# EAGLE board Pro mini (EAGLE 9.6.0)
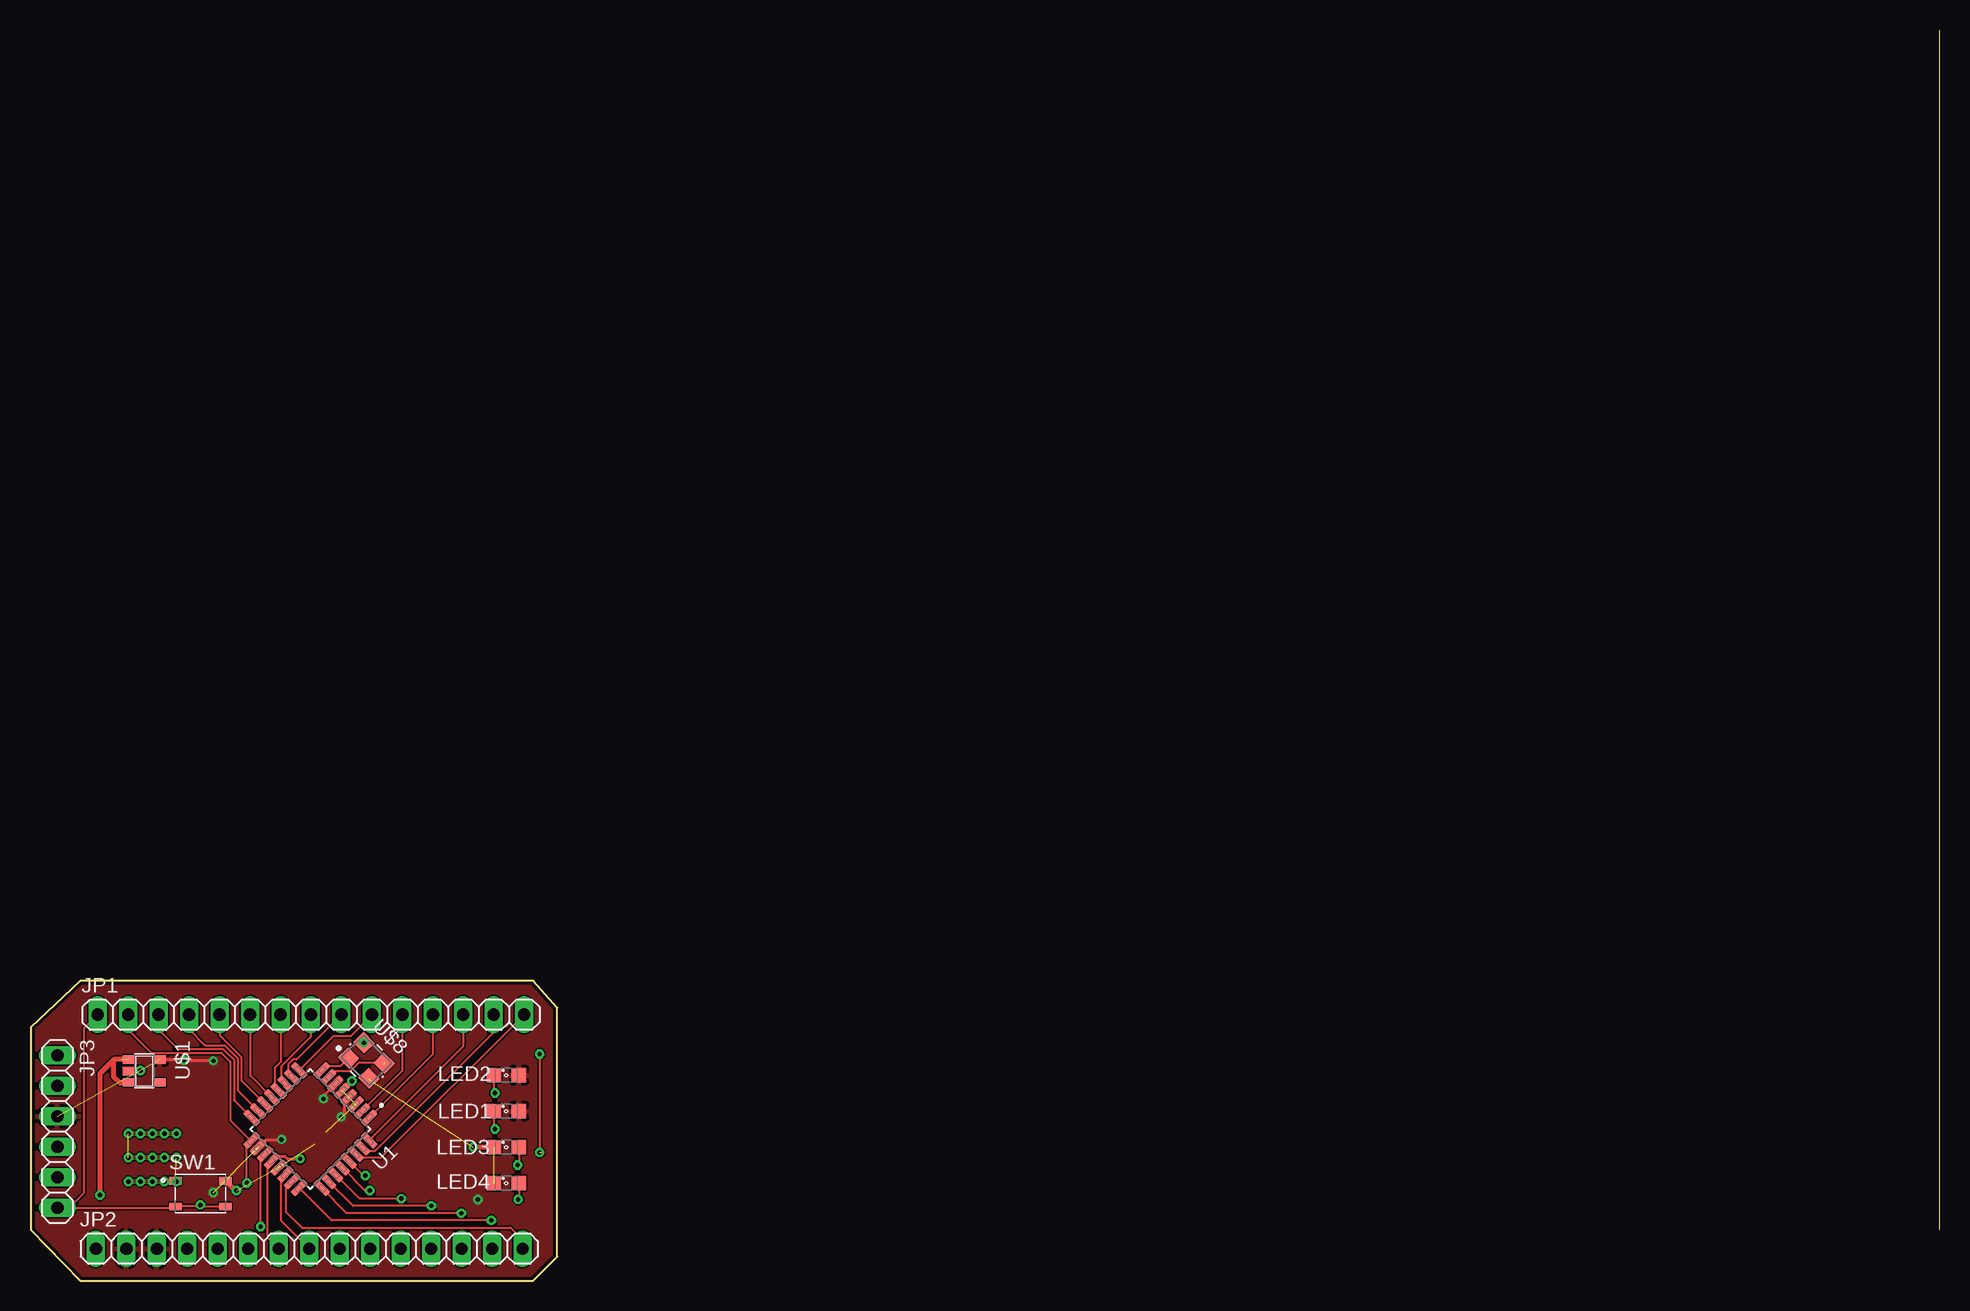
[diagram p0: board, top side]
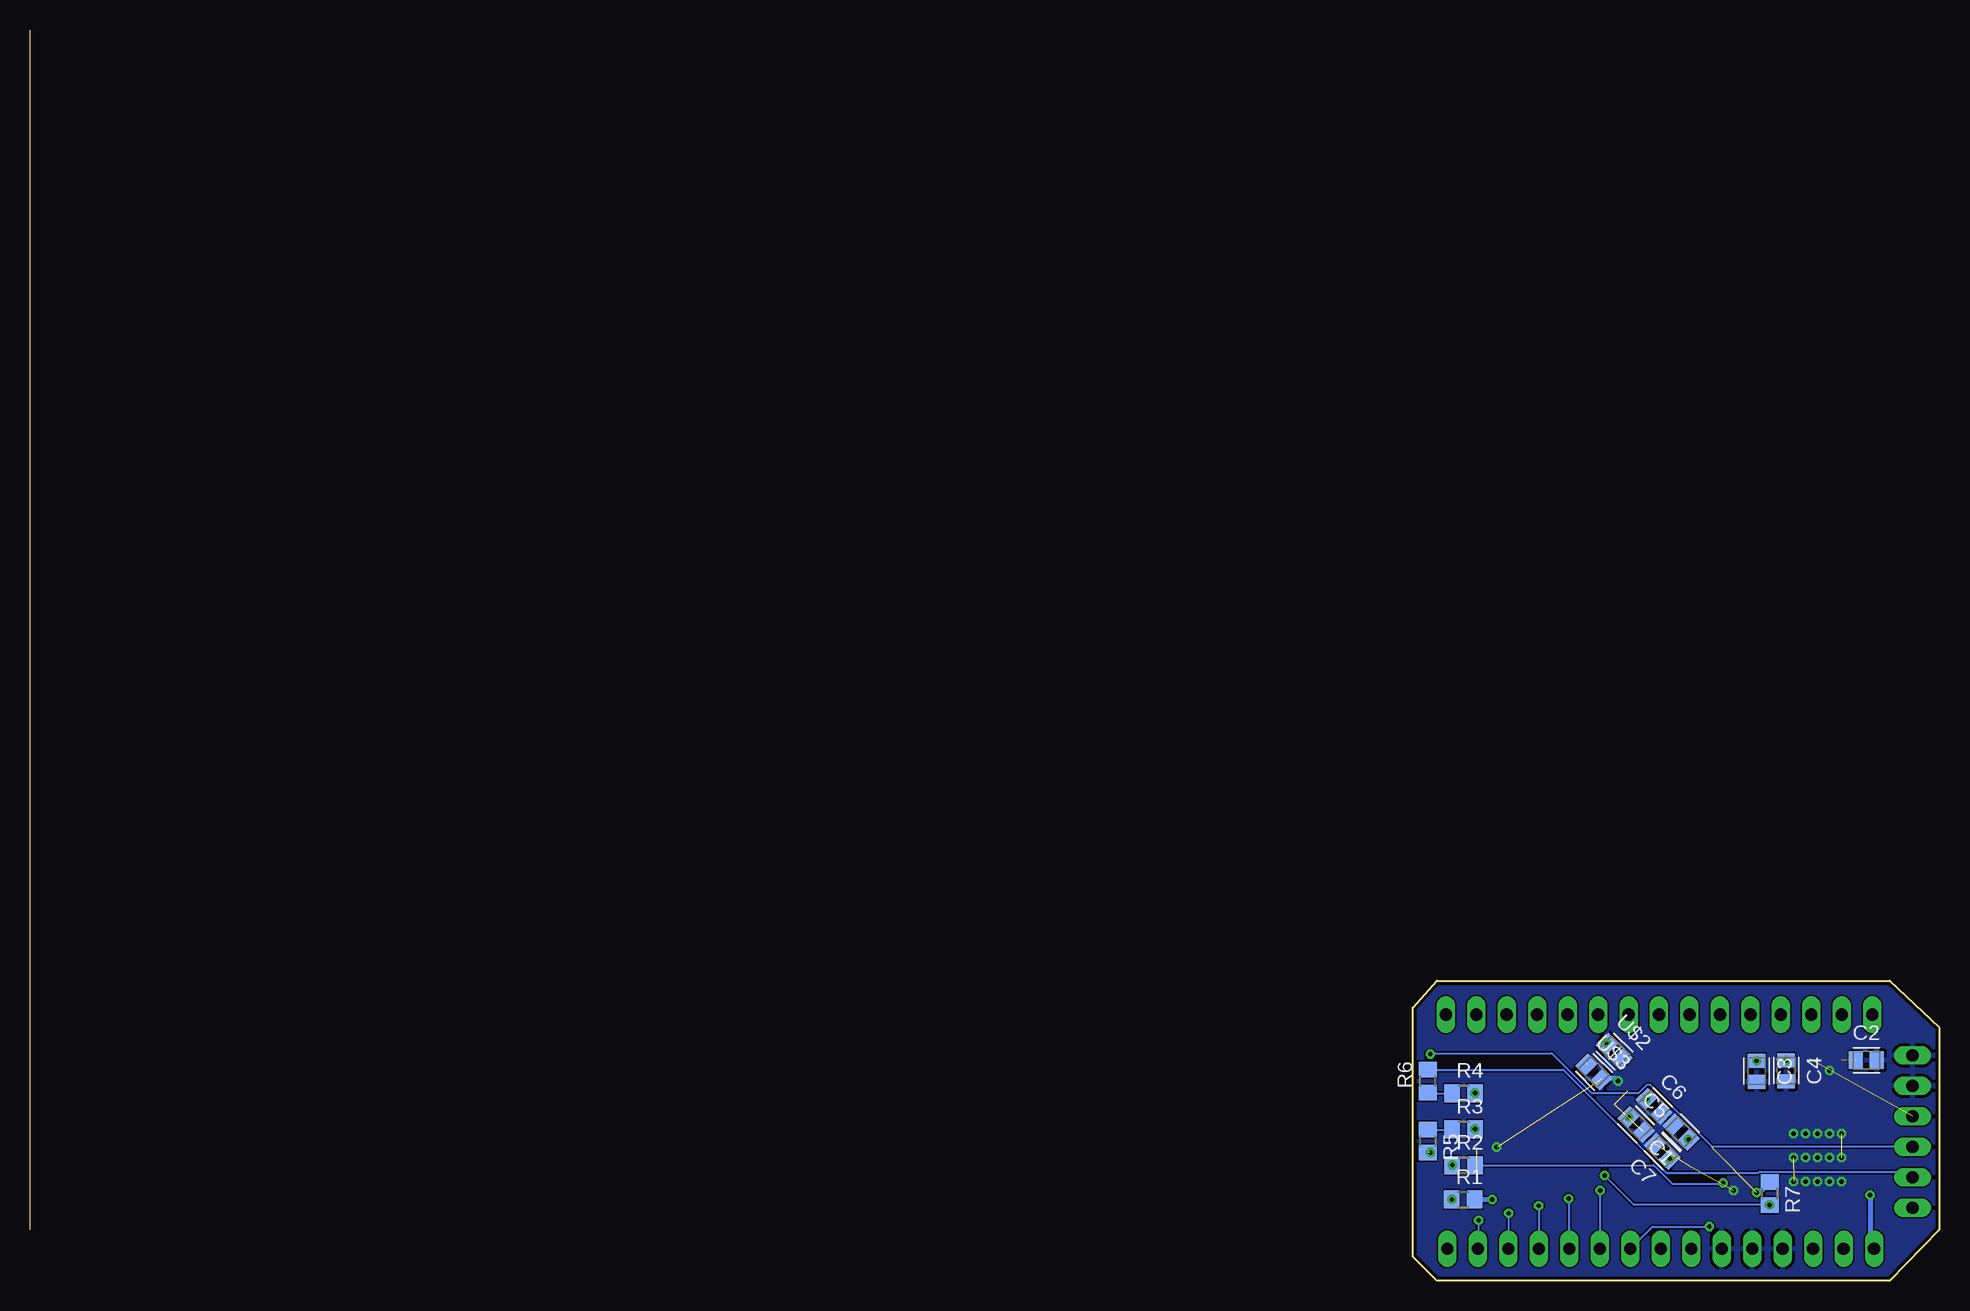
[diagram p1: board, bottom side, seen from below]

Size 159.12 x 104.25 mm. Coordinates in mm from the lower left corner, seen from the top.
Outline: 159.12,4.25 159.12,104.25
Outline: 0,4.25 4.12,0 41.88,0 43.88,2 43.88,22.75 41.88,25 4.12,25 0,21.12 0,4.25
Copper layers (1*16): Top 0.035mm / dielectric 1.5mm / Bottom 0.035mm
Design rules "default *": minimum track width 5mil, minimum drill 0.35mm, track to track 5mil, track to pad 5mil, pad to pad 5mil, via to via 5mil, smd to smd 5mil, copper to edge 10mil, drill to drill 6mil, minimum pad ring 10mil, minimum via ring 8mil, stop-mask expansion 4mil, vias tented up to drill 0mil, thermal gap 10mil

## Footprints (pad centres in the part's own frame; a part is rotated, then mirrored left to right if it is on the bottom)
CAPC2012X110 = smd 1.165 x 1.465: 1 -0.875,0; 2 0.875,0
1X15 = drill 1.016 long: 1 -17.78,0; 2 -15.24,0; 3 -12.7,0; 4 -10.16,0; 5 -7.62,0; 6 -5.08,0; 7 -2.54,0; 8 0,0; 9 2.54,0; 10 5.08,0; 11 7.62,0; 12 10.16,0; 13 12.7,0; 14 15.24,0; 15 17.78,0
1X06 = drill 1.016 long: 1 -6.35,0; 2 -3.81,0; 3 -1.27,0; 4 1.27,0; 5 3.81,0; 6 6.35,0
SML0805 = smd 1.2 x 1.2: A 1.05,0; C -1.05,0
R0805 = smd 1.3 x 1.5: 1 -0.95,0; 2 0.95,0
SW_PTS810_SJM_250_SMTR_LFS = smd 1.05 x 0.65: 1 -2.075,1.075; 2 2.075,1.075; 3 -2.075,-1.075; 4 2.075,-1.075
TQFP-32 = smd 1.5 x 0.57: 1 -4.13,2.8; 2 -4.13,2; 3 -4.13,1.2; 4 -4.13,0.4; 5 -4.13,-0.4; 6 -4.13,-1.2; 7 -4.13,-2; 8 -4.13,-2.8; 17 4.13,-2.8; 18 4.13,-2; 19 4.13,-1.2; 20 4.13,-0.4; 21 4.13,0.4; 22 4.13,1.2; 23 4.13,2; 24 4.13,2.8 | smd 0.57 x 1.5: 9 -2.8,-4.13; 10 -2,-4.13; 11 -1.2,-4.13; 12 -0.4,-4.13; 13 0.4,-4.13; 14 1.2,-4.13; 15 2,-4.13; 16 2.8,-4.13; 25 2.8,4.13; 26 2,4.13; 27 1.2,4.13; 28 0.4,4.13; 29 -0.4,4.13; 30 -1.2,4.13; 31 -2,4.13; 32 -2.8,4.13
SOT23-5 = smd 0.69 x 0.99: 1 -0.95,-1.29; 2 0,-1.29; 3 0.95,-1.29; 4 0.95,1.3; 5 -0.95,1.3
OSCCC320X250X60 = smd 1.312 x 1.212: 1 -1.2,-0.9; 2 1.2,-0.9; 3 1.2,0.9; 4 -1.2,0.9

## Placement (x,y rotation side)
C1  [CAPC2012X110]  21.5,12.38 135 bottom
C2  [CAPC2012X110]  6.05,18.36 0 bottom
C3  [CAPC2012X110]  15.2,17.45 270 bottom
C4  [CAPC2012X110]  12.74,17.49 270 bottom
C5  [CAPC2012X110]  25.25,13.01 315 bottom
C6  [CAPC2012X110]  23.76,14.53 315 bottom
C7  [CAPC2012X110]  23.07,10.77 135 bottom
JP1  [1X15]  23.34,22.16 0 top
JP2  [1X15]  23.2,2.65 0 top
JP3  [1X06]  2.21,12.41 270 top
LED1  [SML0805]  39.62,14.12 0 top
LED2  [SML0805]  39.62,17.12 0 top
LED3  D13  [SML0805]  39.62,11.12 0 top
LED4  [SML0805]  39.62,8.12 0 top
R1  [R0805]  39.66,6.75 0 bottom
R2  [R0805]  39.62,9.62 0 bottom
R3  [R0805]  39.62,12.62 0 bottom
R4  [R0805]  39.62,15.62 0 bottom
R5  [R0805]  42.62,11.62 270 bottom
R6  [R0805]  42.62,16.62 90 bottom
R7  [R0805]  14.12,7.25 270 bottom
SW1  PTS810_SJM_250_SMTR_LFS  [SW_PTS810_SJM_250_SMTR_LFS]  14.12,7.25 0 top
U1  ATMEGA328P-AU  [TQFP-32]  23.29,12.62 225 top
U$1  MIC5205SOT23-5  [SOT23-5]  9.45,17.47 270 top
U$2  [CAPC2012X110]  27.05,19.08 315 bottom
U$3  [CAPC2012X110]  28.77,17.38 315 bottom
U$8  [OSCCC320X250X60]  27.96,18.34 315 top

## Library data of the parts
C1-C7 U$2 U$3 = Capacitor; CATEGORY: Capacitor
JP1-JP3 = pinhead
LED1-LED4 = led
R1-R7 = rcl; SPICEPREFIX: R
SW1 = PTS810_SJM_250_SMTR_LFS; AVAILABILITY: Unavailable; DESCRIPTION: Tactile Switch SPST-NO Top Actuated Surface Mount; MF: C&K; MP: PTS810 SJM 250 SMTR LFS; PACKAGE: None; PRICE: None
U1 = Microcontroller; CREATED_BY: PCBLayout.com; DIGIKEY_PART_NUMBER: ATMEGA328P-AU-ND; MANUFACTURER: Microchip Technology; MPN: ATMEGA328P-AU; PACKAGE: TQFP-32
U$1 = MIC520x
U$8 = Frequency-Source; CATEGORY: Frequency-Source; SUB-CATEGORY: Oscillator

## Nets
+5V: C1.1 C3.1 C4.1 C5.1 C6.1 JP2.2 JP2.3 JP3.3 LED1.A LED2.A R1.2 R7.1 U1.4 U1.6 U1.18 U$1.5
A0: JP2.15 U1.23
A1: JP2.14 U1.24
A2: JP2.13 U1.25
A3: JP2.12 U1.26
A4: JP2.11 U1.27
A5: JP2.10 U1.28
A6: JP2.9 U1.19
A7: JP2.8 U1.22
AREF: C7.1 JP2.7 U1.20
D0: JP1.15 U1.30
D1: JP1.14 U1.31
D2: JP1.13 U1.32
D3: JP1.12 U1.1
D4: JP1.11 U1.2
D5: JP1.10 U1.9
D6: JP1.9 U1.10
D7: JP1.8 U1.11
D8: JP1.7 U1.12
D9: JP1.6 U1.13
D10: JP1.5 U1.14
D11: JP1.4 U1.15
D12: JP1.3 U1.16
D13: JP1.2 R2.2 U1.17
GND: C1.2 C2.2 C3.2 C4.2 C5.2 C6.2 C7.2 JP2.4 JP2.5 JP2.6 JP3.1 JP3.2 LED3.C LED4.C SW1.1 SW1.2 U1.3 U1.5 U1.21 U$1.2 U$2.1 U$3.2 U$8.2 U$8.4
N$1: LED3.A R2.1
N$3: LED1.C R3.2
N$5: JP3.4 R5.2
N$6: JP3.5 R6.2
N$7: LED2.C R4.2
N$8: LED4.A R1.1
OSC1: U1.8 U$2.2 U$8.1
OSC2: U1.7 U$3.1 U$8.3
RAW: C2.1 JP2.1 U$1.1 U$1.3
RST: JP1.1 JP3.6 R7.2 SW1.3 SW1.4 U1.29
RX: R3.1 R5.1
TX: R4.1 R6.1

## Tracks (layer width: path | path; a pad name or v marks a point on that pad's centre or on a via)
+5V  (via drill 0.35)  (2 unrouted)
  Top 0.254: U1.6 24.38,15.41 C6.1 | U1.4 26.49,15.17 26.1,14.79 26.1,13.87 C5.1 | U1.18 19.59,11.75 C1.1 | U$1.5 12.69,18.42 C4.1 15.24,18.37 15.25,18.38 15.25,18.37 C3.1
  Top 0.406: v15.21,7.33 15.12,7.25
  Bottom 0.406: R1.2 v37.26,6.75 v37.25,6.75 | R7.1 14.99,7.33 v15.21,7.33
  other vias: 24.38,15.15 25.86,13.63 20.88,11.76 12.74,18.37 15.2,18.32
  pour Top: -0.12,26.25 29.75,26.25 30,26.5 43.62,26.5 48.38,21.75 48.38,3.88 42.38,-2.12 0.38,-2.12 -0.88,-0.88 -3.38,1.62 -3.38,21.25 -3.38,23
A0
  Top 0.152: U1.23 21.25,7.76 21.25,5.75 22.6,4.4 39.97,4.4 40.98,3.4 JP2.15
A1  (via drill 0.35)
  Top 0.152: v38.38,5.01 25.05,5.01 U1.24
  Bottom 0.152: JP2.14 38.38,2.71 v38.38,5.01
A2  (via drill 0.35)
  Top 0.152: v35.88,5.62 26.33,5.62 U1.25
  Bottom 0.152: JP2.13 35.88,2.67 v35.88,5.62
A3  (via drill 0.35)
  Top 0.152: v33.38,6.22 26.85,6.22 U1.26
  Bottom 0.152: v33.38,6.22 33.38,2.67 JP2.12
A4  (via drill 0.35)
  Top 0.152: v30.88,6.83 27.38,6.83 U1.27
  Bottom 0.152: JP2.11 30.88,2.71 v30.88,6.83
A5  (via drill 0.35)
  Top 0.152: v28.25,7.5 27.88,7.5 25.96,9.42 U1.28
  Bottom 0.152: JP2.10 28.25,2.67 v28.25,7.5
A6  (via drill 0.35)
  Top 0.152: v19.14,4.5 19.14,10.17 U1.19
  Bottom 0.152: JP2.9 23.89,4.5 v19.14,4.5
A7
  Top 0.152: U1.22 21.21,8.82 20.88,8.48 20.88,4.97 JP2.8
AREF  (via drill 0.35)
  Top 0.152: U1.20 20.08,9.95 19.75,9.62 19.75,3.56 JP2.7
  Top 0.254: C7.1 21.37,10.15 21.15,10.37 20.47,10.37 U1.20
  other vias: 22.45,10.15
D0
  Top 0.152: U1.30 27.08,10.55 27.42,10.21 29.17,10.21 JP1.15
D1
  Top 0.152: U1.31 27.65,11.11 27.99,10.78 28.67,10.78 38.58,20.68 JP1.14
D2
  Top 0.152: JP1.13 36.03,19.53 U1.32
D3
  Top 0.152: JP1.12 33.49,18.87 U1.1
D4
  Top 0.152: JP1.11 30.95,17.46 U1.2
D5
  Top 0.152: JP1.10 26.63,20.38 25.2,20.38 U1.9
D6
  Top 0.152: JP1.9 22.14,18.42 21.86,18.42 21.44,18 21.44,17.32 21.78,16.98 U1.10
D7
  Top 0.152: U1.11 21.21,16.42 20.88,16.76 20.88,17.87 23.34,20.33 JP1.8
D8
  Top 0.152: JP1.7 20.8,18.22 20.31,17.73 20.31,16.19 20.65,15.85 U1.12
D9
  Top 0.152: JP1.6 18.25,17.08 U1.13
D10
  Top 0.152: JP1.5 15.71,20.45 17.54,18.63 17.54,16.67 U1.14
D11
  Top 0.152: JP1.4 13.18,20.93 14.5,19.61 16.13,19.61 17.23,18.5 17.23,15.88 18.95,14.16 U1.15
D12
  Top 0.152: JP1.3 10.63,20.91 12.24,19.3 16,19.3 16.93,18.38 16.93,15.02 U1.16
D13  (via drill 0.35)
  Top 0.152: JP1.2 8.1,20.91 10.01,19 15.88,19 16.62,18.25 16.62,13.38 18.25,11.75 | 18.25,11.75 18.32,11.68 U1.17 | v18,8.12 18,11.5 18.25,11.75
  Bottom 0.152: R2.2 27.73,9.62 27.75,9.61 23.79,9.61 22.24,8.06 18.07,8.06 v18,8.12
GND  (via drill 0.35)  (10 unrouted)
  Top 0.254: U$1.2 9.1,17.47 v9.12,17.5
  Top 0.406: U1.5 26.72,16.62 v26.75,16.62 | LED3.C v36.88,11.12 | SW1.2 17.02,7.5 v17.12,7.5
  Bottom 0.406: U$3.2 28.04,16.87 27,16.87 v26.75,16.62 | U$3.2 | U$2.1 27.67,19.75 U$8.4
  other vias: 27.75,19.82 8.12,8.25 12.12,8.25 11.12,8.25 10.12,8.25 9.12,8.25 12.12,10.25 11.12,10.25 10.12,10.25 9.12,10.25 8.12,10.25 12.12,12.25 11.12,12.25 10.12,12.25 9.12,12.25 8.12,12.25
  pour Bottom: -1.5,27.62 -3.38,25.75 -3.38,18.38 -3.38,3.62 1,-0.75 1.88,-1.62 11.12,-1.62 44.75,-1.62 46.75,0.38 46.75,23 43.38,26.38 -0.25,26.38
  pour Top (rank 2): 7.12,13.25 7.12,7.25 13.12,7.25 13.12,13.25
N$1  (via drill 0.35)
  Top 0.152: LED3.A 40.67,9.72 R2.1
  other vias: 40.58,9.62
N$3  (via drill 0.35)
  Top 0.152: LED1.C 38.58,12.72 R3.2
  other vias: 38.67,12.62
N$5  (via drill 0.35)  (1 unrouted)
  Top 0.152: v42.41,18.88 v42.41,10.68
  Bottom 0.152: JP3.4 18.89,11.14 24.06,16.31 24.37,16.31 25.07,15.61 28.93,15.61 32.27,18.95 42.33,18.95 v42.41,18.88
N$6
  Bottom 0.152: R6.2 31.33,17.57 22.74,8.99 15.06,8.99 14.97,9.08 2.68,9.08 JP3.5
N$7  (via drill 0.35)
  Top 0.152: LED2.C 38.58,15.72 R4.2
  other vias: 38.67,15.62
N$8  (via drill 0.35)
  Top 0.152: LED4.A 40.67,6.82 R1.1
  other vias: 40.61,6.75
OSC1  (1 unrouted)
  Top 0.152: U1.8 24.23,17.62 24.47,17.86 25.78,17.86 U$8.1
OSC2  (1 unrouted)
  Top 0.152: U$8.3 27.3,18.13 26.61,17.43 25.27,17.43 U1.7
RAW  (via drill 0.35)  (1 unrouted)
  Top 0.254: 6.92,18.42 6.88,18.38 | U$1.3 8.11,16.47
  Top 0.406: U$1.1 6.92,18.42 5.75,17.25 v5.75,7.12 | 8.11,16.47 7.42,16.47 6.88,17.02 6.88,18.38
  Bottom 0.406: v5.75,7.12 5.75,2.99 JP2.1
RST  (via drill 0.35)
  Top 0.152: JP1.1 4.42,21.02 4.42,7.27 3.21,6.06 JP3.6 11.94,6.06 SW1.3 14.05,6.17 14.12,6.25 R7.2 14.25,6.17 SW1.4 | v27.88,8.75 27.72,8.75 U1.29
  Bottom 0.152: R7.2 25.43,6.3 v27.88,8.75
  other vias: 14.12,6.3
RX
  Bottom 0.152: R5.1 40.62,12.57 R3.1
TX
  Bottom 0.152: R6.1 42.58,15.62 R4.1